# Altium PCB Sensor Interface.PcbDoc
Units mil, origin at the board's own origin, x right, y up, seen from the top; angles counter-clockwise.
Board outline 1975 x 2270 mil, 2 copper layers (Top Layer, Bottom Layer); 21 components, 17 nets, 60 pads, 0 vias.
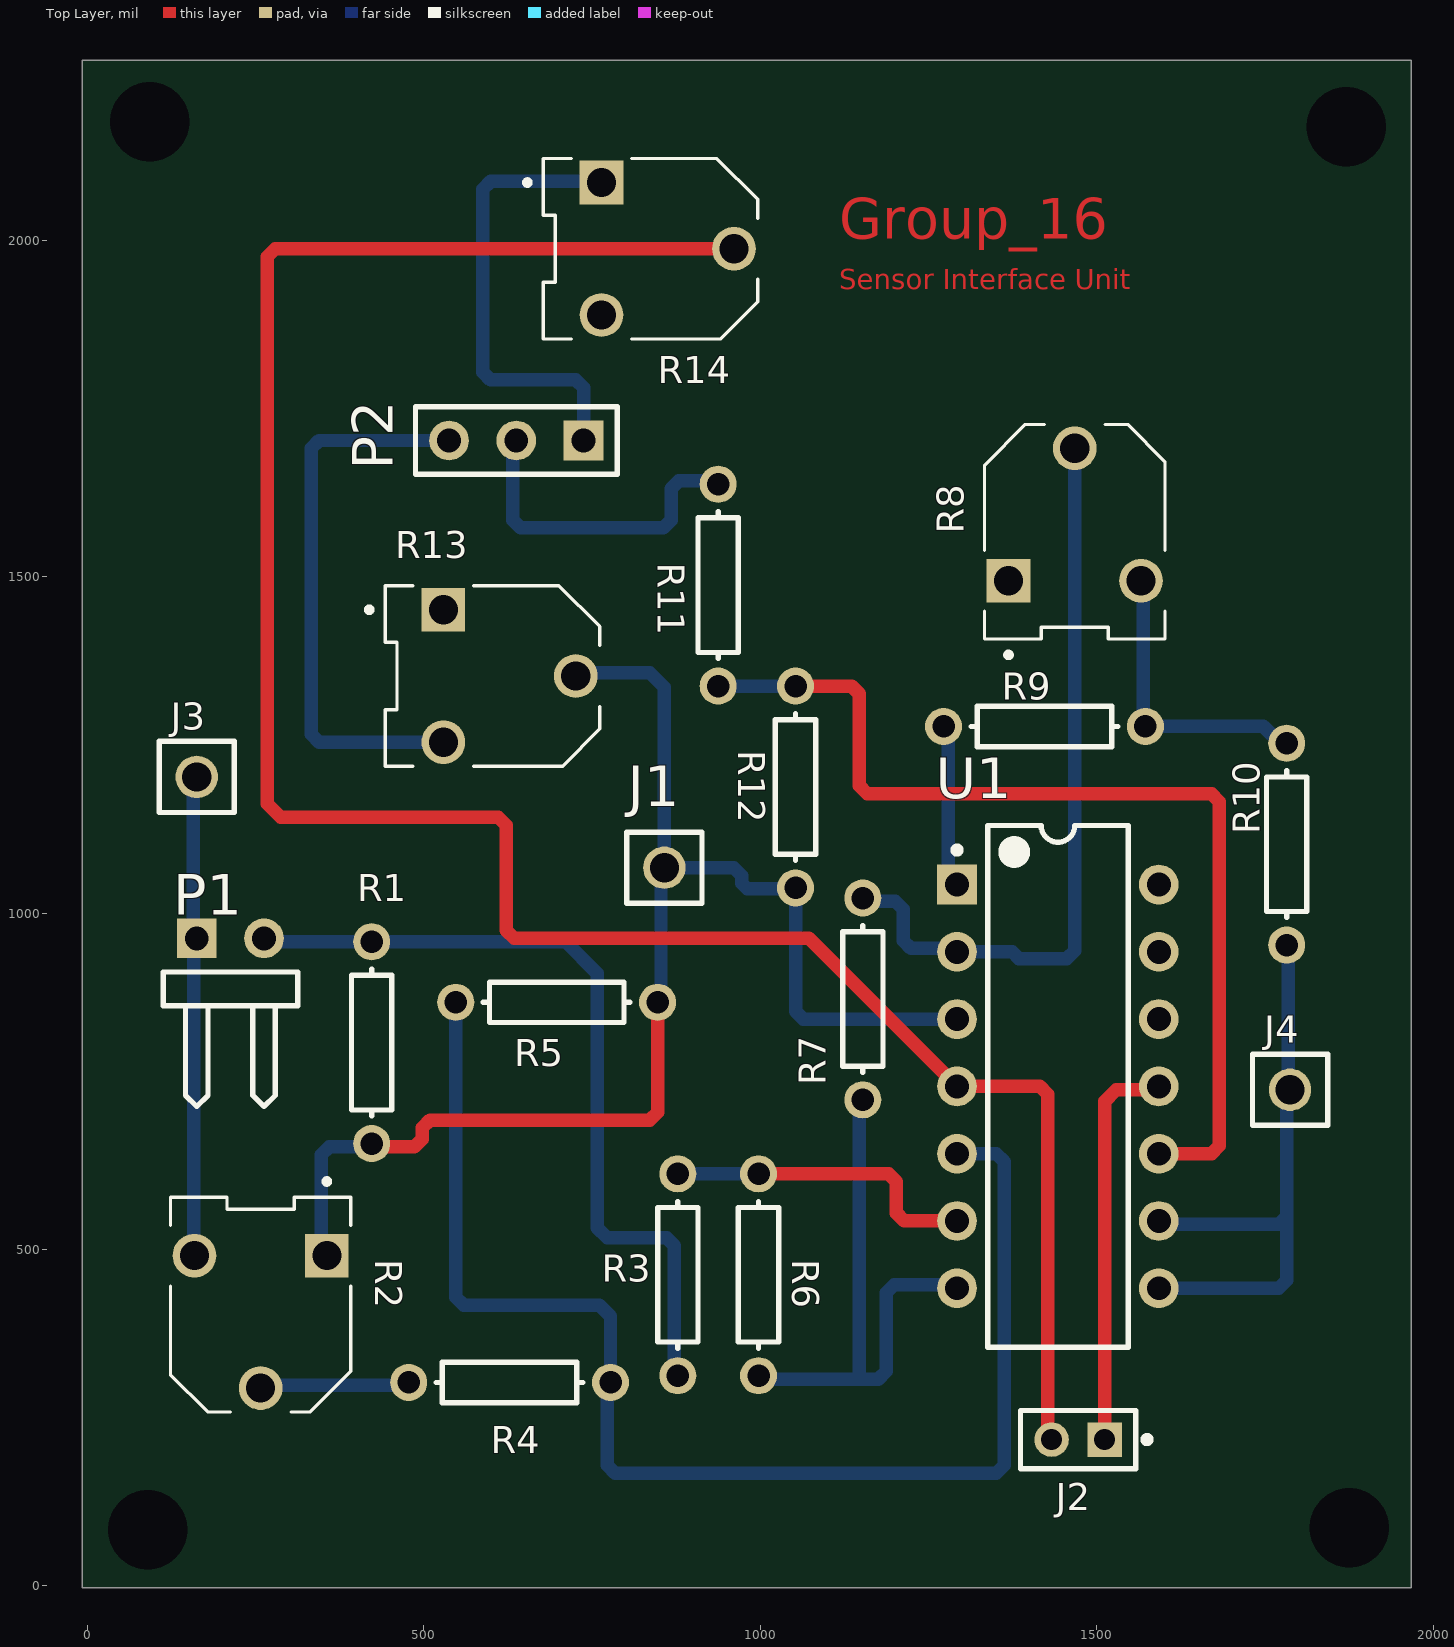
[diagram p0: Top Layer view]
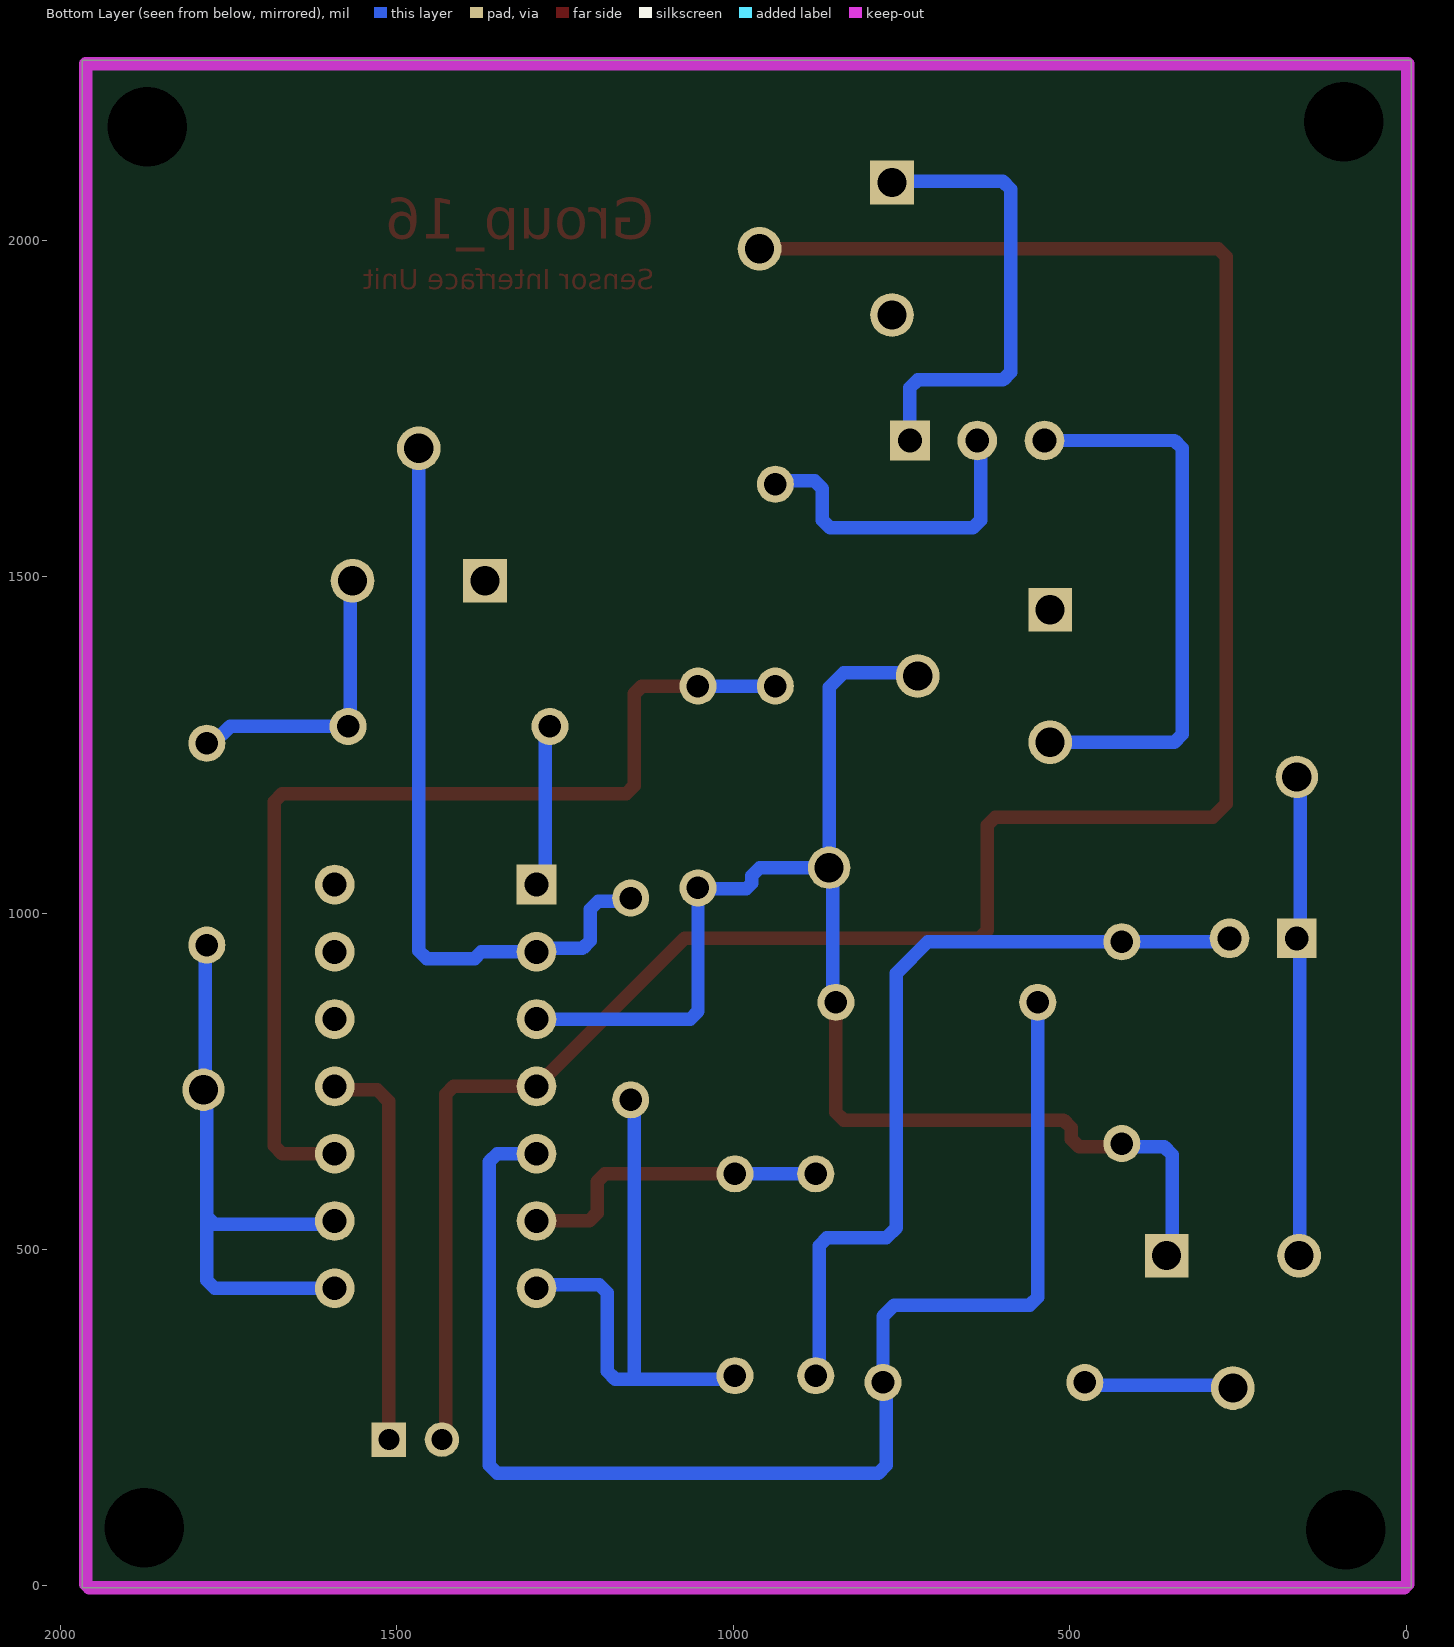
[diagram p1: Bottom Layer view, seen from below]

## Layer stack, top to bottom
Top Solder: solder mask 0.4, Solder Resist, Dk 3.5
Top Layer: signal copper 1.4
Dielectric 1: dielectric 12.6, FR-4, Dk 4.8
Bottom Layer: signal copper 1.4
Bottom Solder: solder mask 0.4, Solder Resist, Dk 3.5

## Board outline
-7.5,-2.5 1967.5,-2.5 1967.5,2267.5 -7.5,2267.5

## Design rules (kind name [scope] priority, off if disabled: settings)
Clearance [All] p1: gap=10 ignorepadtopadclearanceinfootprint=FALSE except(0: Arc-Hole Track-Hole SMDPad-Hole THPad-Hole Via-Hole Fill-Hole Poly-Hole Region-Hole Text-Hole)
PolygonConnect [All] p1: connectstyle=Relief reliefconductorwidth=10 reliefentries=4 polygonreliefangle="90 Angle" airgapwidth=10
RoutingVias [All] p1: holewidth=28 width=50 viastyle="Through Hole" minholewidth=28 minwidth=50 maxholewidth=28 maxwidth=50
SolderMaskExpansion [All] p1: expansion=4 istentingtop=FALSE
Width [All] p1: maxlimit=20 minlimit=20 preferedwidth=20 minimp=50.000000 maximp=50.000000 favimp=50.000000
30 further rules are at their usual default settings.

## Components (designator, comment, footprint, x,y, rotation, side; value= is the part's Value field where it differs from the comment)
J1 "61300111121" 61300111121 857.5,1067.5 r0 top
J2 "M22-2010205" FP-M22-2010205-MFG 1472.5,217.5 r180 top
J3 "61300111121" 61300111121 162.5,1202.5 r0 top
J4 "61300111121" 61300111121 1787.5,737.5 r0 top
P1 "Header 2H" HDR1X2H 162.5,962.5 r0 top
P2 "Header 3" HDR1X3 737.5,1702.5 r180 top
R1 "Res1" AXIAL-0.3 422.5,807.5 r90 top value=4.7K
R2 "3306F-1-105" TRIM_3306F-1-105 257.5,392.5 r270 top
R3 "Res1" AXIAL-0.3 877.5,462.5 r90 top value=1K
R4 "Res1" AXIAL-0.3 627.5,302.5 r0 top value=1K
R5 "Res1" AXIAL-0.3 697.5,867.5 r0 top value=1K
R6 "Res1" AXIAL-0.3 997.5,462.5 r270 top value=1K
R7 "Res1" AXIAL-0.3 1152.5,872.5 r90 top value=1K
R8 "3306F-1-105" TRIM_3306F-1-105 1467.5,1592.5 r90 top
R9 "Res1" AXIAL-0.3 1422.5,1277.5 r0 top value=1K
R10 "Res1" AXIAL-0.3 1782.5,1102.5 r270 top value=1K
R11 "Res1" AXIAL-0.3 937.5,1487.5 r270 top value=1K
R12 "Res1" AXIAL-0.3 1052.5,1187.5 r270 top value=1K
R13 "3306F-1-105" TRIM_3306F-1-105 627.5,1352.5 r0 top
R14 "3306F-1-105" TRIM_3306F-1-105 862.5,1987.5 r0 top
U1 "LM324N" N0014A 1442.5,742.5 r0 top

## Footprints (in the part's own frame and the unit in brackets; to place one, negate y for a bottom-side part, rotate by r counter-clockwise, add the part's x,y. Pads: shape width x height; smd on the part's side, far side on the other; paste and mask are expansions set on the pad)
61300111121 [mm] "Pin Header, pitch 2.54 mm, THT, Vertical, single row, 1p"
  round 1.6 hole 1.1: 1(0,0)
  silkscreen extent -1.42,-1.35 1.42,1.35, body extent -1.27,-1.27 1.27,1.27, height 8.57
AXIAL-0.3 [mm] "Axial Device, Thru-Hole; 2 Leads; 0.3 in Pin Spacing"
  round 1.4 hole 0.85: 1(-3.81,0) 2(3.81,0)
  silkscreen extent -2.77,-0.76 2.77,0.76
FP-M22-2010205-MFG [mm]
  rect 1.3x1.3 hole 0.8 paste-1000 mask+0: 1(-1,0)
  round 1.3 hole 0.8 paste-1000 mask+0: 2(1,0)
  silkscreen extent -2.73,-1.1 2.17,1.1, body extent -2.27,-1.2 2.27,1.2, height 0.25
HDR1X2H [mm] "Connector; Header; 2 Position; Right Angle"
  rect 1.5x1.5 hole 0.9: 1(0,0)
  round 1.5 hole 0.9: 2(2.54,0)
  silkscreen extent -1.27,-6.35 3.81,-1.27
HDR1X3 [mm] "Connector; Header; 3 Position"
  rect 1.5x1.5 hole 0.9: 1(0,0)
  round 1.5 hole 0.9: 2(2.54,0) 3(5.08,0)
  silkscreen extent -1.27,-1.27 6.35,1.27
N0014A [mm] "DIP, 14-Leads, Body 19.7x6.6mm, Pitch 2.54mm"
  rect 1.5x1.5 hole 0.9: 1(-3.81,7.62)
  round 1.5 hole 0.9: 2(-3.81,5.08) 3(-3.81,2.54) 4(-3.81,0) 5(-3.81,-2.54) 6(-3.81,-5.08) 7(-3.81,-7.62) 8(3.81,-7.62) 9(3.81,-5.08) 10(3.81,-2.54) 11(3.81,0) 12(3.81,2.54) 13(3.81,5.08) 14(3.81,7.62)
  silkscreen extent -3.93,-9.85 2.65,9.85, body extent -3.95,-9.85 3.95,9.85, height 5.08
TRIM_3306F-1-105 [mm]
  rect 1.65x1.65 hole 1.1: 1(-2.5,2.5)
  round 1.65 hole 1.1: 2(2.5,0) 3(-2.5,-2.5)
  silkscreen extent -5.4,-3.4 3.4,3.4, body extent -4.7,-3.4 3.4,3.4, height 8.38

## Part data
J1 J3 J4: library part CMP-1502-01058-1, "THT Vertical Pin Header WR-PHD, Pitch 2.54 mm, Single Row, 1 pins", Contact Resistance=20mOhm, Manufacturer="Wurth Elektronik", Operating Temperature=-40to105degC, Rated Current=3A, Withstanding Voltage=500VAC, Working Voltage=250VAC, Datasheet URL=https://katalog.we-online.de/em/datasheet/6130xx11121.pdf, Gender=Male, Manufacturer URL=http://www.we-online.de, Mounting Technology=THT, Orientation=Vertical, Package Reference=61300111121, Packaging=Bag, Part Number=61300111121, Pin Number=1, Pitch=2.54mm, Publisher=WurthElektronik, Row Number=Single
J2: library part CMP-15831-000101-1, "CONN HEADER VERT 2POS 2MM", Case/Package=SIL, Color=Black, Contact Resistance=20mR, Current Rating=1A, Flammability Rating="UL94 V-0", Insulation Resistance=10GR, Max Operating Temperature=105°C, Min Operating Temperature=-55°C, Package Quantity=1000, Voltage Rating=650V, Voltage Rating (AC)=250V, Connector Type="Male Pin", Contact Finish - Mating=GOLD, Contact Material=Bronze, Contact Mating Length=0.138inch, Contact Plating=Gold, Contact Shape=Square, Contact Type="Male Pin", Depth=2mm, Fastening Type=Pull, Gender=Male, Housing Color=Black, Housing Material=Nylon, Insulation Color=Black, Insulation Material=Nylon, Length=4mm, Mated Stacking Heights=8.6mm, Max Current Rating=1A, Mount="Through Hole", Number of Contacts=2, Number of Positions=2, Number of Rows=1, Orientation=Straight, Packaging=Bulk, Pitch=2mm, Radiation Hardening=No, Reach SVHC Compliant=Yes, Series=M22, Termination=Solder
P1: "Header, 2-Pin, Right Angle", LatestRevisionDate=17-Jul-2002, LatestRevisionNote="Re-released for DXP Platform.", Publisher="Altium Limited"
P2: "Header, 3-Pin", LatestRevisionDate=17-Jul-2002, LatestRevisionNote="Re-released for DXP Platform.", Publisher="Altium Limited"
R1 R3 R4 R5 R6 R7 R9 R10 R11 R12: "Resistor", LatestRevisionDate=17-Jul-2002, LatestRevisionNote="Re-released for DXP Platform.", PackageDescription="Axial Device, Thru-Hole; 2 Leads; 0.3 in Pin Spacing", PackageReference=AXIAL-0.3, Published=8-Jun-2000, Publisher="Altium Limited"
R2 R8 R13 R14: "1 MOhms 0.2W, 1/5W PC Pins Through Hole Trimmer Potentiometer Cermet 1 Turn Top Adjustment", Package="3306F Bourns", Availability=Good, Check_prices=https://www.snapeda.com/parts/3306F-1-105/Bourns%20-%20J.W.%20Miller/view-part/862876/?ref=eda, MF=Bourns, MP=3306F-1-105, Price=None, Purchase-URL=https://pricing.snapeda.com/search/part/3306F-1-105/?ref=eda, SnapEDA_Link=https://www.snapeda.com/parts/3306F-1-105/Bourns%20-%20J.W.%20Miller/view-part/862876/?ref=snap
U1: library part CMP-0055-00082-3, "Low Power Quad Operational Amplifier, 14-pin MDIP", Manufacturer="Texas Instruments", Package Reference=N0014A, PackageTopMarking=NSUZXYYTTE#*LM324N, PowerWise=N, Code_JEDEC=MS-001-AA, ComponentLink1Description="Datasheet URL", ComponentLink1URL=http://www.ti.com/general/docs/lit/getliterature.tsp?genericPartNumber=LM324&fileType=pdf, CompType=Amplifiers, PackageDescription="MDIP, .750 x .250 x.130in, 14 Lead, .100in Pitch", PinCount=14, RoHS=N

## Free pads (board coordinates)
  round 60 hole 118.11: 6(89.8,83.72) 6(92.44,2176) 6(1871.31,2168.7) 6(1875.44,86.3)

## Nets (pads, with @x,y where several pads share a name; then routed paths per layer and width w, separated by ;. In a path a pad name is that pad's centre, name@x,y a point inside that pad or via, vN(x,y) a via of type N, cw(c..) or ccw(c..) an arc to the next point about the centre after c; other vN are vias at no path point)
+5: J3.1 P1.1 R2.3 | length 707.2
  Bottom Layer w20: J3.1@157.5,1197.5 157.5,957.5 158.29,956.71 158.29,491.71 R2.3
+12: J2.2 R14.2 U1.4 | length 3457.7
  Top Layer w20: R14.2 279.22,1987.5 267.5,1975.78 267.5,1162.5 287.5,1142.5 610.78,1142.5 622.5,1130.78 622.5,974.22 634.22,962.5 1072.5,962.5 U1.4 1415.78,742.5 1427.5,730.78 1427.5,223.13 J2.2
-12: J2.1 U1.11 | length 598.7
  Top Layer w20: J2.1@1507.5,221.87 J2.1 1511.87,720.15 1529.22,737.5 1587.5,737.5 U1.11
GND: J1.1 R1.1 R2.1 R5.2 R12.2 R13.2 U1.3 | length 2121.8
  Top Layer w20: R1.1 427.5,652.5 485.78,652.5 497.5,664.22 497.5,680.78 509.22,692.5 835.78,692.5 847.5,704.22 R5.2
  Bottom Layer w20: R2.1 347.5,499.35 347.5,640.78 359.22,652.5 417.5,652.5 R1.1 ; R13.2 730.93,1357.5 835.78,1357.5 857.5,1335.78 J1.1 ; R5.2 852.5,872.5 852.5,1062.5 J1.1 ; U1.3@1287.97,847.03 U1.3 1064.22,842.5 1052.5,854.22 R12.2 1051.04,1036.04 980.68,1036.04 972.5,1044.22 972.5,1055.78 960.78,1067.5 J1.1
NetJ4_1: J4.1 R10.2 U1.8 U1.9 | length 894.2
  Bottom Layer w20: U1.8 1770.78,442.5 1782.5,454.22 1782.5,549.22 ; U1.9 1597.5,537.5 1770.78,537.5 1782.5,549.22 ; R10.2 1785,950 1785,740 J4.1 1782.5,732.5 1782.5,549.22
NetP1_2: P1.2 R1.2 R3.1 | length 1226.1
  Top Layer w20: R3.1 R3.1@882.5,317.5
  Bottom Layer w20: P1.2@257.5,957.5 R1.2 710.78,957.5 757.5,910.78 757.5,532.5 772.5,517.5 860.78,517.5 872.5,505.78 872.5,317.5 R3.1
NetP2_1: P2.1 R14.1 | length 691.6
  Bottom Layer w20: P2.1 737.5,1780.78 725.78,1792.5 599.22,1792.5 587.5,1804.22 587.5,2075.78 599.22,2087.5 762.5,2087.5 R14.1
NetP2_2: P2.2 R11.1 | length 488.6
  Bottom Layer w20: P2.2 632.5,1697.5 632.5,1584.22 644.22,1572.5 855.78,1572.5 867.5,1584.22 867.5,1630.78 879.22,1642.5 932.5,1642.5 R11.1
NetP2_3: P2.3 R13.3 | length 836.3
  Bottom Layer w20: R13.3 344.22,1254.07 332.5,1265.79 332.5,1690.78 344.22,1702.5 P2.3
NetR2_2: R2.2 R4.1 | length 223.5
  Bottom Layer w20: R2.2 261.71,298.29 473.29,298.29 R4.1
NetR3_2: R3.2 R6.1 U1.6 | length 474.8
  Top Layer w20: R6.1 1190.78,612.5 1202.5,600.78 1202.5,554.22 1214.22,542.5 U1.6
  Bottom Layer w20: R3.2@880,610 R3.2 R6.1
NetR4_2: R4.2 R5.1 U1.5 | length 2036.9
  Bottom Layer w20: R5.1@552.5,862.5 R5.1 547.5,429.22 559.22,417.5 760.78,417.5 777.5,400.78 R4.2 772.5,297.5 772.5,179.22 784.22,167.5 1350.78,167.5 1362.5,179.22 1362.5,630.78 1350.78,642.5 U1.5
NetR6_2: R6.2 R7.1 U1.7 | length 842.5
  Bottom Layer w20: R6.2 1002.5,307.5 1147.5,307.5 ; R7.1 1147.5,717.5 1147.5,307.5 ; U1.7 1287.5,447.5 1199.22,447.5 1187.5,435.78 1187.5,319.22 1175.78,307.5 1147.5,307.5
NetR7_2: R7.2 R8.2 U1.2 | length 1131.1
  Bottom Layer w20: R7.2 1157.5,1017.5 1200.78,1017.5 1212.5,1005.78 1212.5,959.22 1224.22,947.5 1287.5,947.5 U1.2 1374.43,942.5 1384.43,932.5 1455.78,932.5 1467.5,944.22 R8.2
NetR8_3: R8.3 R9.2 R10.1 | length 439.7
  Bottom Layer w20: R8.3 1569.21,1490.79 1569.21,1280.79 R9.2 1748,1277.5 1773,1252.5 R10.1
NetR9_1: R9.1 U1.1 | length 243.3
  Bottom Layer w20: R9.1 1279.22,1270.78 1279.22,1055.78 U1.1
NetR11_2: R11.2 R12.1 U1.10 | length 1502.5
  Top Layer w20: R12.1 1135.78,1337.5 1147.5,1325.78 1147.5,1189.22 1159.22,1177.5 1670.78,1177.5 1682.5,1165.78 1682.5,654.22 1670.78,642.5 U1.10
  Bottom Layer w20: R11.2 R12.1
pads on no net: R8.1 R13.1 R14.3 U1.12 U1.13 U1.14

## Keep-outs
Bottom Layer:
  lines w19.68: -2.5,2.5 -2.5,2262.5 1962.5,2262.5 1962.5,2.5 1957.5,-2.5 2.5,-2.5 -2.5,2.5

## Other copper
Top Layer:
  text "Group_16" at 1117.5,2002.49 h60
  text "Sensor Interface Unit" at 1117.6,1927.5 h30